# Altium PCB Shield_Arduino_Due.PCBDOC
Units mm, origin at the board's own origin, x right, y up, seen from the top; angles counter-clockwise.
Board outline 299.72 x 199.9 mm, 2 copper layers (Top Layer, Bottom Layer); 27 components, 28 nets, 196 pads, 23 vias.
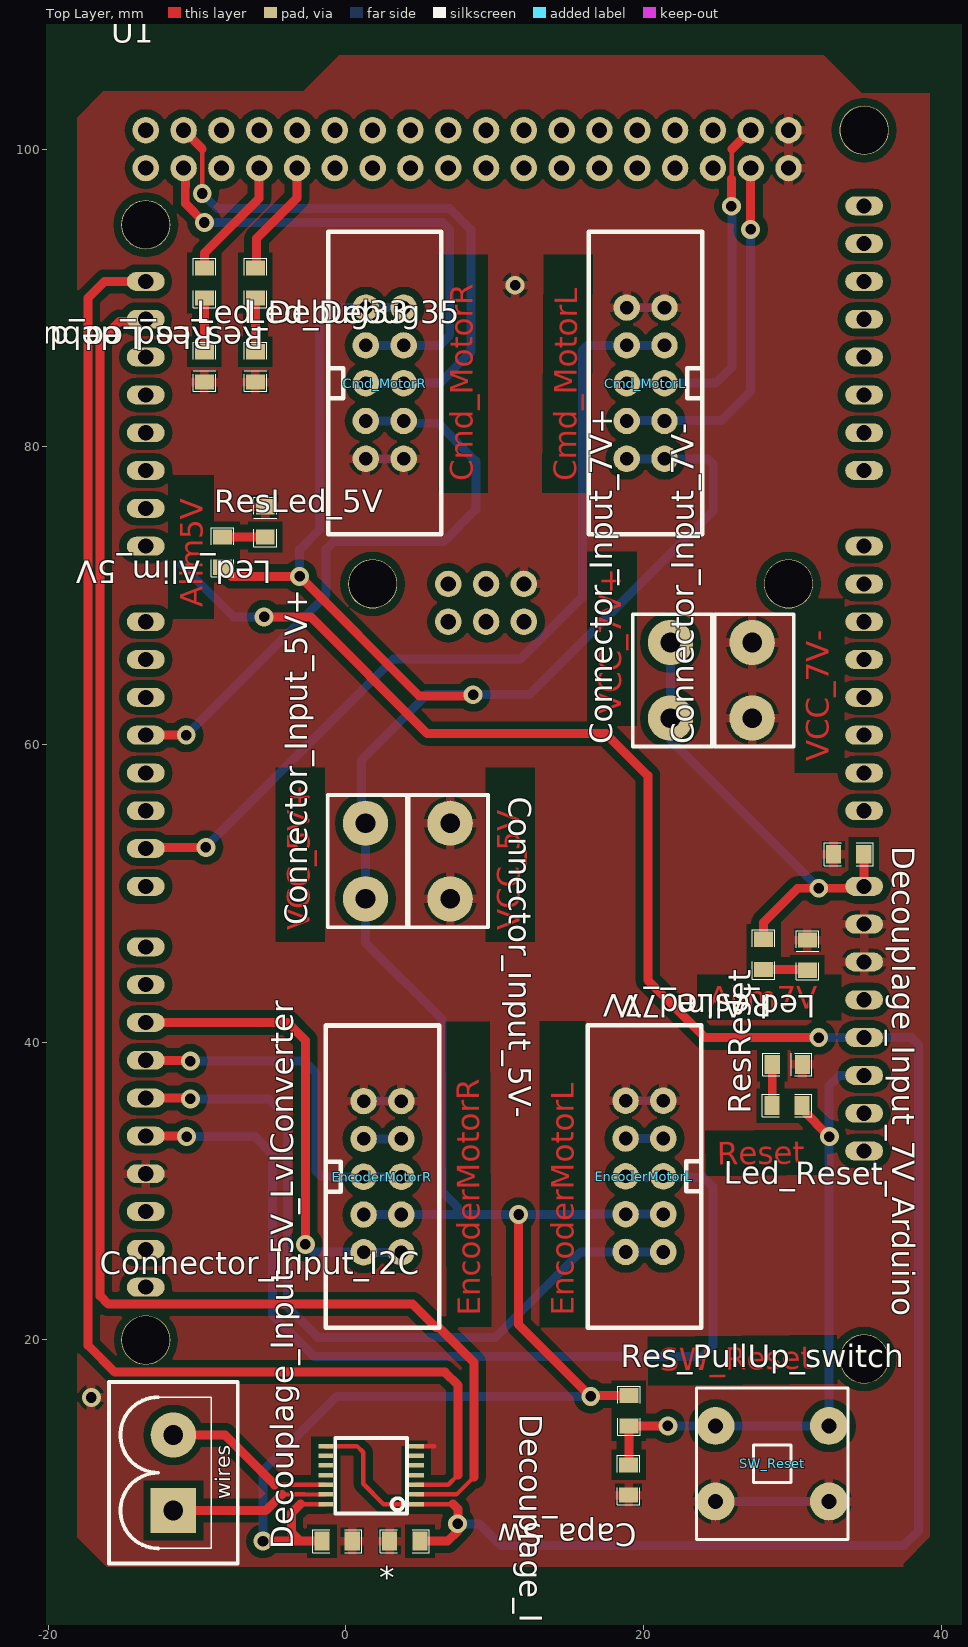
[diagram p0: Top Layer view]
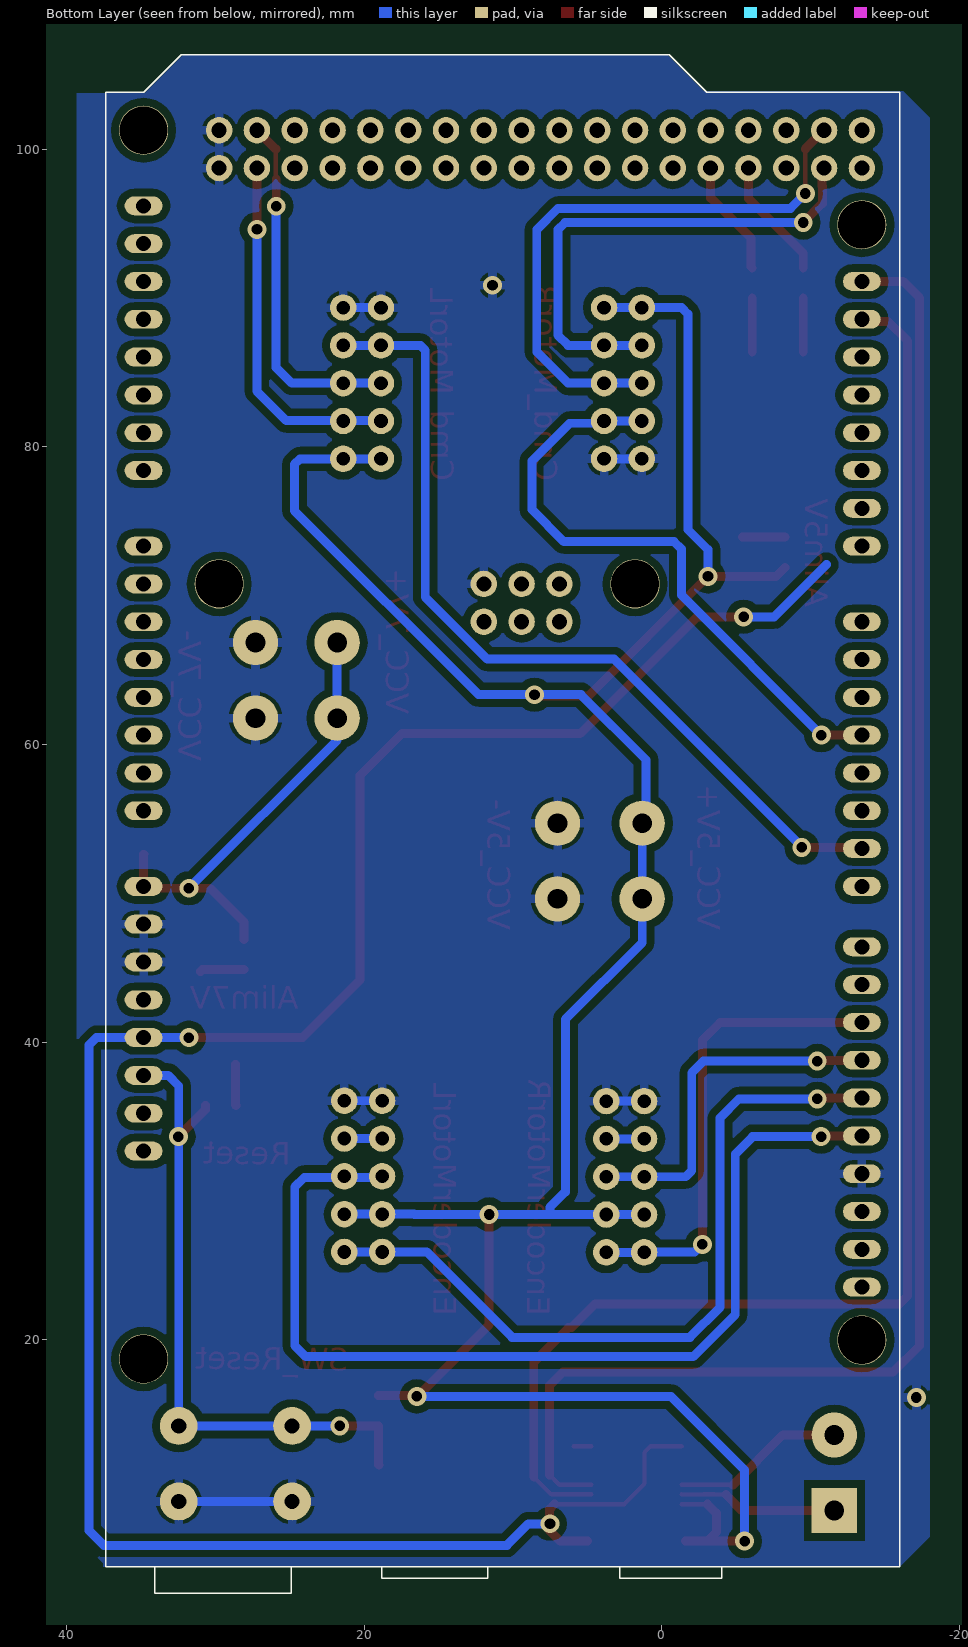
[diagram p1: Bottom Layer view, seen from below]

## Layer stack, top to bottom
Top Solder: solder mask 0.0102, Solder Resist, Dk 3.5
Top Layer: signal copper 0.0356
Dielectric1: dielectric 0.32, FR-4, Dk 4.8
Bottom Layer: signal copper 0.0356
Bottom Solder: solder mask 0.0102, Solder Resist, Dk 3.5

## Board outline
-141.655,-46.39 158.065,-46.39 158.065,153.508 -141.655,153.508

## Design rules (kind name [scope] priority, off if disabled: settings)
Clearance Clearance_bottom_polygon [OnLayer('Bottom Layer') Or OnLayer('Multi-Layer') vs OnLayer('Bottom Layer')  And  InPoly] p1: gap=0.508
Clearance Clearance_top_polygon [OnLayer('Top Layer')  Or OnLayer('Multi-Layer') vs OnLayer('Top Layer') And InPoly] p2: gap=0.508
Clearance Clearance_bottom [OnLayer('Bottom Layer') Or OnLayer('Multi-Layer') vs OnLayer('Bottom Layer')  And Not InPoly] p3: gap=0.203
Clearance Clearance_top [OnLayer('Top Layer')  Or OnLayer('Multi-Layer') vs OnLayer('Top Layer') And Not InPoly] p4: gap=0.203
Clearance Clearance_pad_to_pad [OnLayer('Multi-Layer') vs OnLayer('Multi-Layer')] p5: gap=0.254
ComponentClearance ComponentClearance_bottom [OnLayer('Bottom Overlay') vs OnLayer('Bottom Overlay')] p1: gap=0 collisioncheckmode=3 verticalgap=0.254 showdistances=FALSE
ComponentClearance ComponentClearance_top [OnLayer('Top Overlay') vs OnLayer('Top Overlay')] p2: gap=0 collisioncheckmode=3 verticalgap=0.254 showdistances=FALSE
FabricationTestPointUsage TestPointUsage [All] p1: valid=0 allowmultiple=FALSE
FabricationTestpoint Testpoint [All] p1: side=3 testpointundercomponent=TRUE minsize=1.016 maxsize=2.54 preferedsize=1.524 minholesize=0 maxholesize=1.016 preferedholesize=0.813 testpointgrid=0.025 allowsidetop=TRUE allowsidebottom=TRUE usegrid=TRUE gridtolerance=0
HoleSize [All] p1: absolutevalues=TRUE maxlimit=25.4 minlimit=0.406 maxpercent=80.000 minpercent=20.000
MinimumAnnularRing [PadXSize_AllLayers = PadYSize_AllLayers] p1: minimumring=0.254
PermittedLayers [All] p1: toplayerpermitted=TRUE bottomlayerpermitted=TRUE
PolygonConnect [All] p1: connectstyle=Relief reliefconductorwidth=0.61 reliefentries=4 polygonreliefangle="90 Angle" airgapwidth=0.254
RoutingVias [All] p1: holewidth=0.406 width=0.813 viastyle="Through Hole" minholewidth=0.4 minwidth=0.8 maxholewidth=0.6 maxwidth=10
SMDToPlane [All] p1: distance=0
SolderMaskExpansion [All] p1: expansion=0.102
ViasUnderSMD [All] p1: allowed=FALSE
Width Width_botom_top [OnLayer('Bottom Layer') or OnLayer('Top Layer')] p1: maxlimit=254 minlimit=0.254 preferedwidth=0.813 minimp=50.000000 maximp=50.000000 favimp=50.000000
26 further rules are at their usual default settings.

## Components (designator, comment, footprint, x,y, rotation, side; value= is the part's Value field where it differs from the comment)
* "LvlConverter_Adg3304" LvlConverter_Adg3304 4.75,8.966 r180 top
Capa_Sw "CAP" 0805 18.999,11.608 r270 top
Cmd_MotorL "comment" HE10-10V 21.412,79.197 r180 top
Cmd_MotorR "comment" HE10-10V 1.346,89.357 r0 top
Connector_Input_5V+ "Connector_Cosse" Connector_Cosse 1.321,49.632 r180 top
Connector_Input_5V- "Connector_Cosse" Connector_Cosse 7.01,54.712 r0 top
Connector_Input_7V+ "Connector_Cosse" Connector_Cosse 21.819,61.773 r180 top
Connector_Input_7V- "Connector_Cosse" Connector_Cosse 27.305,61.773 r180 top
Connector_Input_I2C "comment" AMP_2 -11.582,8.534 r90 top
Decouplage_Input_3.3V_LvlConverter "CAP" 0805 2.946,6.477 r0 top
Decouplage_Input_5V_LvlConverter "CAP" 0805 0.432,6.477 r180 top
Decouplage_Input_7V_Arduino "CAP" 0805 32.766,52.629 r0 top
EncoderMotorL "comment" HE10-10V 21.336,25.908 r180 top
EncoderMotorR "comment" HE10-10V 1.194,36.043 r0 top
Led_Alim_5V "comment" LED0805 -5.41,75.971 r270 top
Led_Alim_7V "comment" LED0805 31.013,46.863 r270 top
Led_Debug33 "comment" LED0805 -9.5,84.353 r90 top
Led_Debug35 "comment" LED0805 -6.071,84.353 r90 top
Led_Reset "comment" LED0805 30.683,38.506 r180 top
Res_Led_debug33 "RES" 0805 -9.5,92.024 r270 top
Res_Led_debug35 "RES" 0805 -6.071,92.024 r270 top
Res_PullUp_switch "RES" 0805 19.025,14.224 r90 top
ResLed_5V "RES" 0805 -8.28,71.907 r90 top
ResLed_7V "RES" 0805 28.067,46.914 r270 top
ResReset "RES" 0805 30.658,35.738 r180 top
SW_Reset "SW_PB" KSA 32.461,14.224 r270 top
U1 "ARDUINO_DUE" ARDUINO_DUE 37.363,4.75 r90 top locked

## Footprints (in the part's own frame and the unit in brackets; to place one, negate y for a bottom-side part, rotate by r counter-clockwise, add the part's x,y. Pads: shape width x height; smd on the part's side, far side on the other; paste and mask are expansions set on the pad)
0805 [mil]
  rect 40x50 smd: 1(0,0) 2(80,0)
  silkscreen extent -25,-30 105,30
AMP_2 [mil]
  rect 120x120 hole 52: 1(0,0)
  round 120 hole 52: 2(200,0)
  silkscreen extent -140,-170 340,170
ARDUINO_DUE [mil]
  oval 50x100 hole 40: 1(740,2000) 2(840,2000) 3(940,2000) 4(1040,2000) 5(1140,2000) 6(1240,2000) 7(1340,2000) 8(1440,2000) 9(1540,2000) 10(1640,2000) 11(1800,2000) 12(1900,2000) 13(2000,2000) 14(2100,2000) 15(2200,2000) 16(2300,2000) 17(2400,2000) 18(2500,2000) 19(2700,2000) 20(2800,2000) 21(2900,2000) 22(3000,2000) 23(3100,2000) 24(3200,2000) 25(3300,2000) 26(3400,2000) 63(3600,100) 64(3500,100) 65(3400,100) 66(3300,100) 67(3200,100) 68(3100,100) 69(3000,100) 70(2900,100) 71(2700,100) 72(2600,100) 73(2500,100) 74(2400,100) 75(2300,100) 76(2200,100) 77(2100,100) 78(2000,100) 79(1800,100) 80(1700,100) 81(1600,100) 82(1500,100) 83(1400,100) 84(1300,100) 85(1200,100) 86(1100,100)
  round 70 hole 40: 27(3700,2000) 28(3800,2000) 29(3700,1900) 30(3800,1900) 31(3700,1800) 32(3800,1800) 33(3700,1700) 34(3800,1700) 35(3700,1600) 36(3800,1600) 37(3700,1500) 38(3800,1500) 39(3700,1400) 40(3800,1400) 41(3700,1300) 42(3800,1300) 43(3700,1200) 44(3800,1200) 45(3700,1100) 46(3800,1100) 47(3700,1000) 48(3800,1000) 49(3700,900) 50(3800,900) 51(3700,800) 52(3800,800) 53(3700,700) 54(3800,700) 55(3700,600) 56(3800,600) 57(3700,500) 58(3800,500) 59(3700,400) 60(3800,400) 61(3700,300) 62(3800,300) 87(2500,1200) 88(2600,1200) 89(2500,1100) 90(2600,1100) 91(2500,1000) 92(2600,1000)
  round 130 hole 126: ""(550,100) ""(600,2000) ""(2600,300) ""(2600,1400) ""(3550,2000) ""(3800,100)
Connector_Cosse [mil]
  round 120 hole 52.01: 1(0,0) 1(0,-200)
  silkscreen extent -110,-275 100,75
HE10-10V [mil]
  round 70 hole 36: 1(0,0) 2(100,0) 3(0,-100) 4(100,-100) 5(0,-200) 6(100,-200) 7(0,-300) 8(100,-300) 9(0,-400) 10(100,-400)
  silkscreen extent -100,-600 200,200
KSA [mil]
  round 100 hole 40: 1(200,-300) 2(200,0) 3(0,0) 4(0,-300)
  silkscreen extent -100,-350 300,50
LED0805 [mil]
  rect 40x50 smd: A(80,0) K(0,0)
  silkscreen extent -25,-30 105,30
LvlConverter_Adg3304 [mm]
  rect 1x0.3 smd: 1(0,0) 2(0,-0.65) 3(0,-1.3) 4(0,-1.95) 5(0,-2.6) 6(0,-3.25) 7(0,-3.9) 8(6.1,-3.9) 9(6.1,-3.25) 10(6.1,-2.6) 11(6.1,-1.95) 12(6.1,-1.3) 13(6.1,-0.65) 14(6.1,0)
  silkscreen extent 0.63,-4.44 5.46,0.64

## Part data
Capa_Sw Decouplage_Input_3.3V_LvlConverter Decouplage_Input_5V_LvlConverter Decouplage_Input_7V_Arduino: "capacité non polarisée"
Cmd_MotorL Cmd_MotorR EncoderMotorL EncoderMotorR: library part HE10-10, "10-pin connector"
Connector_Input_I2C: library part POWER2, "connecteur alim 2 pôles"
Led_Alim_5V Led_Alim_7V Led_Debug33 Led_Debug35 Led_Reset: library part LED, "LED 5mm/3mm/CMS"
Res_Led_debug33 Res_Led_debug35 Res_PullUp_switch ResLed_5V ResLed_7V ResReset: "resistance"

## Via types
v1: diameter 1.27, hole 0.711, Top Layer to Bottom Layer, 23 vias

## Nets (pads, with @x,y where several pads share a name; then routed paths per layer and width w, separated by ;. In a path a pad name is that pad's centre, name@x,y a point inside that pad or via, vN(x,y) a via of type N, cw(c..) or ccw(c..) an arc to the next point about the centre after c; other vN are vias at no path point)
CMD_MOTEURL_IN1: Cmd_MotorL.3 Cmd_MotorL.4 U1.59 | length 24.2
  Top Layer w0.6: v1(27.203,94.615) U1.59
  Bottom Layer w0.6: Cmd_MotorL.4 18.898,81.763 25.222,81.763 27.203,83.744 v1(27.203,94.615) ; Cmd_MotorL.3@21.361,81.686 Cmd_MotorL.3
CMD_MOTEURL_IN2: Cmd_MotorL.5 Cmd_MotorL.6 U1.60 | length 24
  Top Layer w0.3: 25.908,98.006 25.933,98.031 25.933,100
  Top Layer w0.6: v1(25.908,96.164) 25.908,98.006 ; 25.933,100 U1.60
  Bottom Layer w0.6: Cmd_MotorL.6 Cmd_MotorL.5 24.867,84.277 25.933,85.344 25.933,96.139 v1(25.908,96.164)
CMD_MOTEURR_IN1: Cmd_MotorR.3 Cmd_MotorR.4 U1.29 | length 33.9
  Top Layer w0.6: U1.29 -10.77,98.603 -10.77,97.521 -10.784,97.507 -10.784,96.356 v1(-9.5,95.072)
  Bottom Layer w0.6: v1(-9.5,95.072) 6.502,95.072 6.985,94.59 6.985,87.503 6.299,86.817 Cmd_MotorR.4 Cmd_MotorR.3
CMD_MOTEURR_IN2: Cmd_MotorR.5 Cmd_MotorR.6 U1.30 | length 40
  Top Layer w0.3: v1(-9.645,97.021) -9.645,100.019
  Top Layer w0.6: U1.30 -9.645,100.019
  Bottom Layer w0.6: v1(-9.645,97.021) -8.636,96.012 6.985,96.012 8.407,94.59 8.407,86.385 6.299,84.277 Cmd_MotorR.6 Cmd_MotorR.5
ENCODER0PINA_L: EncoderMotorL.5 EncoderMotorL.6 U1.5 | length 67.7
  Top Layer w0.6: U1.5 v1@-10.668,33.706
  Bottom Layer w0.6: v1(-10.693,33.655) -6.096,33.655 -4.928,32.487 -4.928,21.692 -2.108,18.872 23.927,18.872 24.663,19.609 24.663,30.277 24.028,30.912 18.872,30.912 EncoderMotorL.6
ENCODER0PINA_R: EncoderMotorR.5 EncoderMotorR.6 U1.7 | length 24.2
  Top Layer w0.6: U1.7 v1@-10.465,38.786
  Bottom Layer w0.6: v1(-10.439,38.735) -2.794,38.735 -2.007,37.948 -2.007,31.369 -1.6,30.963 EncoderMotorR.5 EncoderMotorR.6
ENCODER0PINB_L: EncoderMotorL.1 EncoderMotorL.2 U1.6 | length 51.4
  Top Layer w0.6: U1.6 v1@-10.312,36.246
  Bottom Layer w0.6: v1(-10.439,36.195) -5.182,36.195 -3.912,34.925 -3.912,22.2 -1.88,20.168 10.058,20.168 15.799,25.908 EncoderMotorL.2 EncoderMotorL.1 EncoderMotorL.1@21.311,25.883
ENCODER0PINB_R: EncoderMotorR.9 EncoderMotorR.10 U1.8 | length 31.3
  Top Layer w0.6: U1.8 -3.912,41.326 -2.718,40.132 v1@-2.718,26.695
  Bottom Layer w0.6: v1(-2.718,26.416) -2.21,25.908 1.168,25.908 EncoderMotorR.9 EncoderMotorR.10
GND: *.7 Capa_Sw.2 Cmd_MotorL.9 Cmd_MotorL.10 Cmd_MotorR.9 Cmd_MotorR.10 Connector_Input_5V-.1 Connector_Input_7V-.1 Decouplage_Input_3.3V_LvlConverter.1 Decouplage_Input_5V_LvlConverter.1 Decouplage_Input_7V_Arduino.1 EncoderMotorL.9 EncoderMotorL.10 EncoderMotorR.1 EncoderMotorR.2 Led_Alim_5V.K Led_Alim_7V.K Led_Debug33.K Led_Debug35.K Led_Reset.K SW_Reset.1 SW_Reset.2 U1.4 U1.61 U1.62 U1.80 U1.81 U1.92 | length 19.1
  Top Layer w0.3: *.7 5.932,12.866
  Bottom Layer w0.6: EncoderMotorR.1@1.295,35.941 EncoderMotorR.1 EncoderMotorR.2 ; Cmd_MotorR.9 Cmd_MotorR.10 ; EncoderMotorL.10 EncoderMotorL.9 ; Cmd_MotorL.10 Cmd_MotorL.9 ; SW_Reset.1 SW_Reset.2
  other v1: -17.094,16.129 11.379,90.856
NetEncoderMotorL_7: EncoderMotorL.7 EncoderMotorL.8 | length 2.5
  Bottom Layer w0.6: EncoderMotorL.8 EncoderMotorL.7
NetEncoderMotorR_3: EncoderMotorR.3 EncoderMotorR.4 | length 2.5
  Bottom Layer w0.6: EncoderMotorR.3 EncoderMotorR.4
NetLed_Alim_5V_A: Led_Alim_5V.A ResLed_5V.2 | length 2.9
  Top Layer w0.6: ResLed_5V.2 Led_Alim_5V.A
NetLed_Alim_7V_A: Led_Alim_7V.A ResLed_7V.2 | length 3
  Top Layer w0.6: ResLed_7V.2 30.861,44.882 Led_Alim_7V.A@30.988,44.755
NetLed_Debug33_A: Led_Debug33.A Res_Led_debug33.2 | length 3.6
  Top Layer w0.6: Led_Debug33.A Res_Led_debug33.2
"NetLed_Debug35 _A": Led_Debug35.A Res_Led_debug35.2 | length 3.6
  Top Layer w0.6: Led_Debug35.A Res_Led_debug35.2
NetLed_Reset_A: Led_Reset.A ResReset.2 | length 2.8
  Top Layer w0.6: ResReset.2 28.651,35.763 Led_Reset.A
PIN_DEBUG33: Res_Led_debug33.1 U1.33 | length 8.2
  Top Layer w0.6: Res_Led_debug33.1 -9.5,93.015 -5.817,96.698 U1.33
PIN_DEBUG35: Res_Led_debug35.1 U1.35 | length 7.9
  Top Layer w0.6: Res_Led_debug35.1 -5.994,92.1 -5.994,94.005 -3.277,96.723 U1.35
PWM_MOTORL: Cmd_MotorL.7 Cmd_MotorL.8 U1.12 | length 58.7
  Top Layer w0.6: U1.12 -13.36,53.086 v1(-9.398,53.086)
  Bottom Layer w0.6: U1.12 U1.12@-13.31,53.137 ; v1@-9.398,53.137 3.2,65.735 11.735,65.735 15.9,69.901 15.9,86.487 16.231,86.817 Cmd_MotorL.8 Cmd_MotorL.7
PWM_MOTORR: Cmd_MotorR.7 Cmd_MotorR.8 U1.15 | length 42
  Top Layer w0.6: U1.15 v1(-10.719,60.63)
  Bottom Layer w0.6: v1(-10.719,60.63) -1.321,70.028 -1.321,73.127 -0.813,73.635 6.579,73.635 8.738,75.794 8.738,79.045 6.198,81.585 4.039,81.585 Cmd_MotorR.8 Cmd_MotorR.7
RESET: Capa_Sw.1 Res_PullUp_switch.1 ResReset.1 SW_Reset.3 SW_Reset.4 U1.84 | length 44.4
  Top Layer w0.6: Capa_Sw.1 19.025,11.633 Res_PullUp_switch.1 v1(21.641,14.224) ; ResReset.1 30.658,35.484 v1(32.487,33.655)
  Bottom Layer w0.6: v1(21.641,14.224) SW_Reset.4 SW_Reset.3 32.461,37.059 33.172,37.77 U1.84
SCL3.3V: *.3 U1.26 | length 109.8
  Top Layer w0.3: *.3 6.888,10.266 7.544,10.922
  Top Layer w0.6: U1.26 -16.205,91.11 -17.313,90.002 -17.313,19.625 -15.524,17.836 6.655,17.836 7.544,16.947 7.544,10.922
SCL5V: *.13 Connector_Input_I2C.1 | length 10.7
  Top Layer w0.3: -4.297,9.613 -3.537,9.613 -3.534,9.616 -2.781,9.616 -2.777,9.613 -1.353,9.613 *.13
  Top Layer w0.6: Connector_Input_I2C.1 -5.376,8.534 -4.297,9.613
SDA3.3V: *.2 U1.25 | length 106.8
  Top Layer w0.3: *.2 7.432,9.616 8.611,10.795
  Top Layer w0.6: U1.25 -13.589,88.417 -15.21,88.417 -16.51,87.117 -16.51,22.962 -15.956,22.408 4.498,22.408 6.077,20.829 6.273,20.829 8.611,18.491 8.611,10.795
SDA5V: *.12 Connector_Input_I2C.2 | length 11.6
  Top Layer w0.3: -4.78,10.266 *.12
  Top Layer w0.6: Connector_Input_I2C.2 -8.128,13.614 -4.78,10.266
VCC3.3: *.1 *.8 Decouplage_Input_3.3V_LvlConverter.2 U1.83 | length 151.7
  Top Layer w0.3: *.8 0.748,12.866 1.168,12.446 1.168,10.338 2.54,8.966 *.1 ; *.1@4.75,8.963 7.217,8.963
  Top Layer w0.6: v1(-5.486,68.58) -2.362,68.58 5.486,60.731 17.475,60.731 20.295,57.912 20.295,44.171 24.155,40.31 v1(31.775,40.31) ; Decouplage_Input_3.3V_LvlConverter.2 6.833,6.477 7.544,7.188 7.544,8.636 7.217,8.963
  Bottom Layer w0.6: -11.049,72.085 -7.544,68.58 v1(-5.486,68.58) ; v1(7.518,7.645) 8.966,7.645 10.414,6.198 37.49,6.198 38.481,7.188 38.481,39.827 37.998,40.31 U1.83 v1(31.775,40.31)
VCC5: *.14 Cmd_MotorL.1 Cmd_MotorL.2 Cmd_MotorR.1 Cmd_MotorR.2 Connector_Input_5V+.1 Decouplage_Input_5V_LvlConverter.2 EncoderMotorL.3 EncoderMotorL.4 EncoderMotorR.7 EncoderMotorR.8 Res_PullUp_switch.2 ResLed_5V.1 | length 191.8
  Top Layer w0.3: -3.051,8.963 *.14@-1.35,8.963
  Top Layer w0.6: ResLed_5V.1 -7.671,71.298 v1(-3.099,71.298) 4.953,63.246 8.458,63.246 v1(8.56,63.348) ; v1(-5.563,6.477) -3.048,6.477 ; -3.051,8.963 -3.658,8.357 -3.658,7.087 -3.048,6.477 ; Decouplage_Input_5V_LvlConverter.2 -3.048,6.477 ; v1(11.608,28.423) 11.608,21.031 16.383,16.256 Res_PullUp_switch.2
  Bottom Layer w0.6: v1(-5.563,6.477) -5.563,11.252 -0.61,16.205 v1(16.459,16.205) ; v1(-3.099,71.298) -3.099,73.101 -1.753,74.447 -1.753,88.925 -1.321,89.357 Cmd_MotorR.1 Cmd_MotorR.2 ; Connector_Input_5V+.1@1.118,54.712 1.067,54.661 1.067,58.979 5.436,63.348 v1(8.56,63.348) 12.319,63.348 24.689,75.717 24.689,78.816 24.308,79.197 Cmd_MotorL.1 Cmd_MotorL.2 ; EncoderMotorR.7 EncoderMotorR.8 7.518,28.423 ; Connector_Input_5V+.1@1.321,54.712 1.321,49.632 1.321,46.685 6.477,41.529 6.477,29.947 7.518,28.905 7.518,28.423 ; EncoderMotorL.3 EncoderMotorL.4 16.662,28.448 16.637,28.423 v1(11.608,28.423) 7.518,28.423
VCC7: Connector_Input_7V+.1 Decouplage_Input_7V_Arduino.2 ResLed_7V.1 U1.79 | length 31.7
  Top Layer w0.6: ResLed_7V.1 28.067,48.057 30.353,50.343 v1(31.775,50.343) 34.696,50.343 U1.79 34.823,52.603 Decouplage_Input_7V_Arduino.2
  Bottom Layer w0.6: Connector_Input_7V+.1@21.819,66.853 21.819,61.773 21.819,60.3 v1(31.775,50.343)
pads on no net: *.4 *.5 *.6 *.9 *.10 *.11 U1. U1.1 U1.2 U1.3 U1.9 U1.10 U1.11 U1.13 U1.14 U1.16 U1.17 U1.18 U1.19 U1.20 U1.21 U1.22 U1.23 U1.24 U1.27 U1.28 U1.31 U1.32 U1.34 U1.36 U1.37 U1.38 U1.39 U1.40 U1.41 U1.42 U1.43 U1.44 U1.45 U1.46 U1.47 U1.48 U1.49 U1.50 U1.51 U1.52 U1.53 U1.54 U1.55 U1.56 U1.57 U1.58 U1.63 U1.64 U1.65 U1.66 U1.67 U1.68 U1.69 U1.70 U1.71 U1.72 U1.73 U1.74 U1.75 U1.76 U1.77 U1.78 U1.82 U1.85 U1.86 U1.87 U1.88 U1.89 U1.90 U1.91

## Polygon pours and split planes (outlines as drawn)
GND on Bottom Layer "Mechanical 1-No Net" (solid, pour order 4): -15.977,4.75 -18.009,6.782 -17.983,6.807 -17.983,102.108 -16.256,103.835 -16.205,103.886 -2.794,103.886 -2.794,103.911 -0.406,106.299 -0.381,106.324 32.131,106.324 32.182,106.324 34.671,103.835 34.747,103.759 39.319,103.759 39.319,6.782 39.294,6.756 37.516,4.978 37.516,4.775
GND on Top Layer "Mechanical 1-No Net" (solid, pour order 3): -16.051,4.744 -18.083,6.776 -18.057,6.802 -18.057,102.103 -16.33,103.83 -16.279,103.881 -2.868,103.881 -2.868,103.906 -0.48,106.294 -0.455,106.319 32.057,106.319 32.108,106.319 34.597,103.83 34.673,103.754 39.245,103.754 39.245,6.776 39.22,6.751 37.442,4.973 37.442,4.77

## Keep-outs
Keep-Out Layer:
  rectangle: -140.695,-42.73 -135.695,157.27
  rectangle: -135.695,-42.73 154.305,-37.73
  rectangle: 149.305,-37.73 154.305,157.27
  rectangle: -135.695,152.27 149.305,157.27

## Other copper
Top Layer:
  text "Alim5V" at -9.627,69.215 h1.52 r90
  text "VCC_7V+" at 18.517,62.027 h1.52 r90
  text "VCC_7V-" at 32.461,58.877 h1.52 r90
  text "VCC_5V+" at -2.413,47.523 h1.52 r90
  text "VCC_5V-" at 11.684,47.523 h1.52 r90
  text "Alim7V" at 24.384,42.24 h1.52
  text "Reset" at 24.943,31.775 h1.52 r0.67

## Silkscreen, mask and mechanical layers (free items; w line width, h text height)
Top Overlay:
  text "Les bandes en violet delimitent la surface utilisable...." at -144.907,179.832 h6.35
  text "Mais vous n'etes pas obliges de tout utiliser!!" at -128.651,169.545 h6.35
Mechanical 1:
  lines w0.254: -18.009,6.807 -15.951,4.75 37.363,4.75 39.345,6.731 39.345,103.81 34.646,103.81 32.131,106.324 -0.406,106.324 -2.87,103.861 -15.977,103.861 -16.256,103.861 -18.009,102.108 -18.009,6.807

## Text inside footprints (layer, text, board x,y; h text height)
Connector_Input_I2C: Top Overlay "wires" at -7.772,9.296 h1 r90